# Altium PCB dtdsl.PcbDoc
Units mil, origin at the board's own origin, x right, y up, seen from the top; angles counter-clockwise.
Board outline 6000 x 4000 mil, 2 copper layers (Top Layer, Bottom Layer); 46 components, 29 nets, 140 pads, 0 vias.
Unrouted connection lines stored in the file: 51.
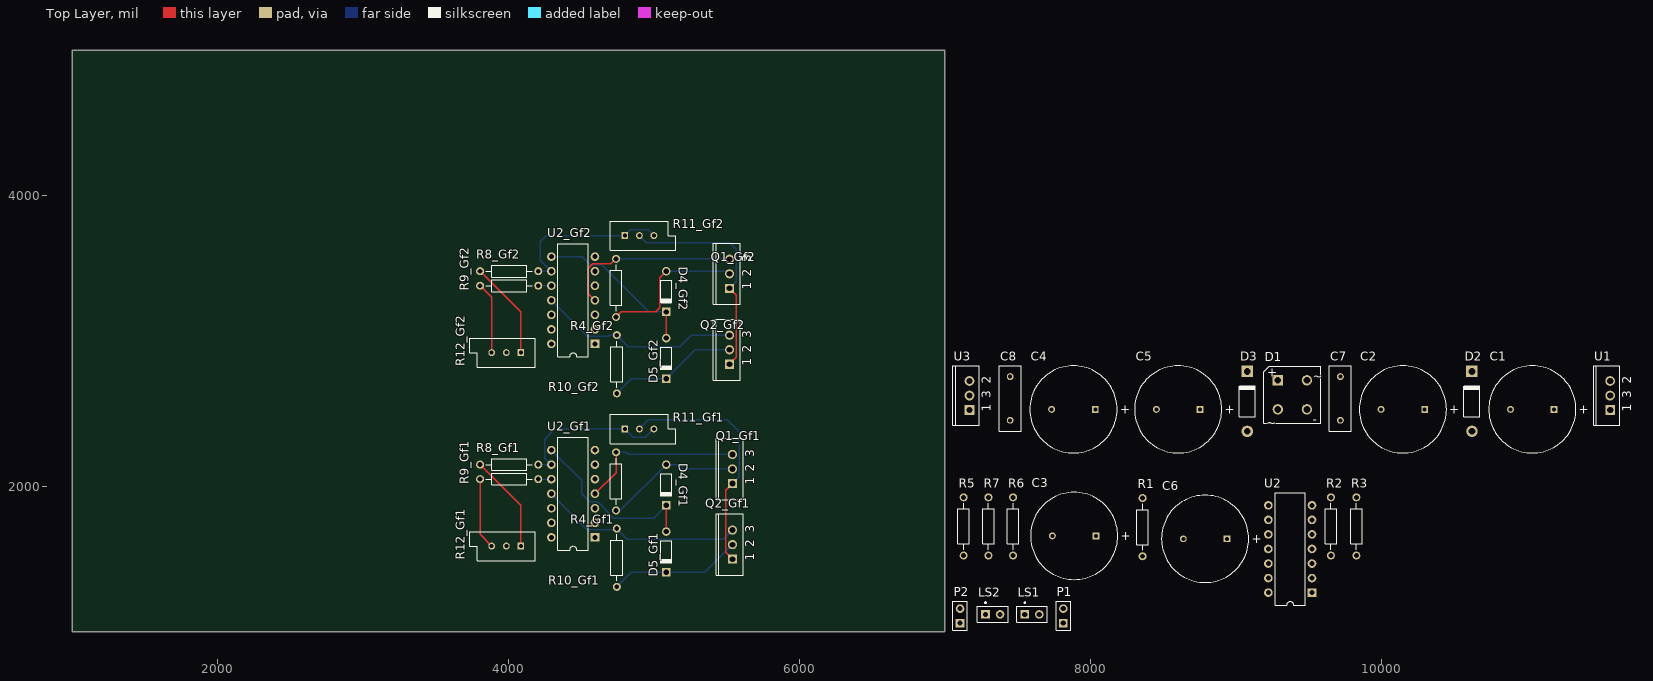
[diagram p0: Top Layer view]
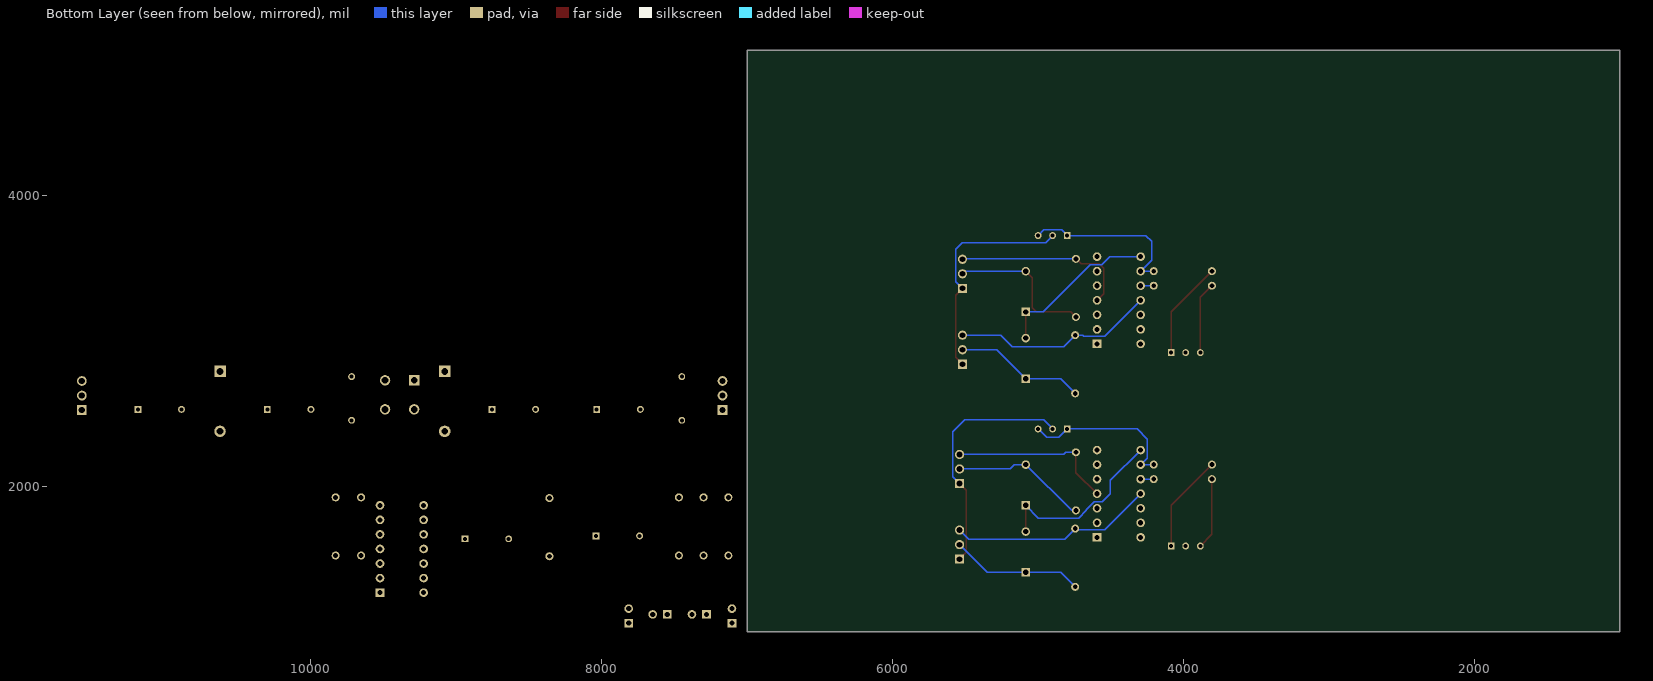
[diagram p1: Bottom Layer view, seen from below]

## Layer stack, top to bottom
Top Solder: solder mask 0.4, Solder Resist, Dk 3.5
Top Layer: signal copper 1.4
Dielectric1: dielectric 12.6, FR-4, Dk 4.8
Bottom Layer: signal copper 1.4
Bottom Solder: solder mask 0.4, Solder Resist, Dk 3.5

## Board outline
1000,1000 7000,1000 7000,5000 1000,5000

## Design rules (kind name [scope] priority, off if disabled: settings)
Clearance [All] p1: gap=10 ignorepadtopadclearanceinfootprint=FALSE except(0: Arc-Hole Track-Hole SMDPad-Hole THPad-Hole Via-Hole Fill-Hole Poly-Hole Region-Hole Text-Hole)
FabricationTestPointUsage TestPointUsage [All] p1: valid=0 allowmultiple=FALSE
FabricationTestpoint Testpoint [All] p1: side=3 testpointundercomponent=TRUE minsize=40 maxsize=100 preferedsize=60 minholesize=0 maxholesize=40 preferedholesize=32 testpointgrid=1 allowsidetop=TRUE allowsidebottom=TRUE usegrid=TRUE gridtolerance=0.01
PolygonConnect [All] p1: connectstyle=Relief reliefconductorwidth=10 reliefentries=4 polygonreliefangle="90 Angle" airgapwidth=10
RoomDefinition Gf1 [InComponentClass('Gf1')] p1: confinementstyle=ConfineIn formatcopy=TRUE lockcomponents=FALSE outline 3665,1250 5740,1250 5740,2525 3665,2525
RoomDefinition Gf2 [InComponentClass('Gf2')] p2: confinementstyle=ConfineIn formatcopy=TRUE lockcomponents=FALSE outline 3665,2580 5740,2580 5740,3855 3665,3855
RoomDefinition U_Sourse [InComponentClass('U_Sourse')] p3: confinementstyle=ConfineIn formatcopy=TRUE lockcomponents=FALSE outline 7045,2220 11735,2220 11735,2940 7045,2940
RoomDefinition dtdsl [InComponentClass('dtdsl')] p4: confinementstyle=ConfineIn formatcopy=TRUE lockcomponents=FALSE outline 7045,1000 7875,1000 7875,1320 7045,1320
RoomDefinition U_Op [InComponentClass('U_Op')] p5: confinementstyle=ConfineIn formatcopy=TRUE lockcomponents=FALSE outline 7080,1170 9915,1170 9915,2070 7080,2070
RoutingVias [All] p1: holewidth=28 width=50 viastyle="Through Hole" minholewidth=28 minwidth=50 maxholewidth=28 maxwidth=50
SolderMaskExpansion [All] p1: expansion=4
Width [All] p1: maxlimit=10 minlimit=10 preferedwidth=10
28 further rules are at their usual default settings.

## Classes and differential pairs
component class dtdsl: LS1 LS2 P1 P2
component class Gf1: D4_Gf1 D5_Gf1 Q1_Gf1 Q2_Gf1 R4_Gf1 R8_Gf1 R9_Gf1 R10_Gf1 R11_Gf1 R12_Gf1 U2_Gf1
component class Gf2: D4_Gf2 D5_Gf2 Q1_Gf2 Q2_Gf2 R4_Gf2 R8_Gf2 R9_Gf2 R10_Gf2 R11_Gf2 R12_Gf2 U2_Gf2
component class U_Op: C3 C6 R1 R2 R3 R5 R6 R7 U2
component class U_Sourse: C1 C2 C4 C5 C7 C8 D1 D2 D3 U1 U3
net class GF[1..2]: GF1 GF2
channel class Gf: Gf1 Gf2

## Components (designator, comment, footprint, x,y, rotation, side; value= is the part's Value field where it differs from the comment)
C1 "Cap Pol1" RB7.6-15 11040,2530 r0 top
C2 "Cap Pol1" RB7.6-15 10150,2530 r0 top
C3 "Cap Pol1" RB7.6-15 7890,1660 r0 top
C4 "Cap Pol1" RB7.6-15 7885,2530 r0 top
C5 "Cap Pol1" RB7.6-15 8605,2530 r0 top
C6 "Cap Pol1" RB7.6-15 8790,1640 r0 top
C7 "Cap" RAD-0.3 9720,2605 r90 top
C8 "Cap" RAD-0.3 7450,2605 r90 top
D1 "18DB05" D-38 9390,2630 r0 top
D2 "Diode 1N4001" DO-41 10625,2585 r90 top
D3 "Diode 1N4001" DO-41 9080,2585 r90 top
D4_Gf1 "Diode 1N4148" DO-35 5085,2010 r270 top (schematic designator D4)
D4_Gf2 "Diode 1N4148" DO-35 5085,3340 r270 top (schematic designator D4)
D5_Gf1 "Diode 1N4148" DO-35 5085,1550 r270 top (schematic designator D5)
D5_Gf2 "Diode 1N4148" DO-35 5085,2880 r270 top (schematic designator D5)
LS1 "Speaker" PIN2 7550,1120 r0 top
LS2 "Speaker" PIN2 7280,1120 r0 top
P1 "Header 2" HDR1X2 7815,1060 r90 top
P2 "Header 2" HDR1X2 7105,1060 r90 top
Q1_Gf1 "2N3904" TO-220AB 5540,2120 r90 top (schematic designator Q1)
Q1_Gf2 "2N3904" TO-220AB 5520,3462.05 r90 top (schematic designator Q1)
Q2_Gf1 "2N3906" TO-220AB 5540,1600 r90 top (schematic designator Q2)
Q2_Gf2 "2N3906" TO-220AB 5520,2940 r90 top (schematic designator Q2)
R1 "Res2" AXIAL-0.4 8360,1720 r90 top
R2 "Res2" AXIAL-0.4 9655,1725 r90 top
R3 "Res2" AXIAL-0.4 9830,1725 r90 top
R4_Gf1 "Res2" AXIAL-0.4 4740,2035 r90 top (schematic designator R4)
R4_Gf2 "Res2" AXIAL-0.4 4740,3365 r90 top (schematic designator R4)
R5 "Res2" AXIAL-0.4 7130,1725 r90 top
R6 "Res2" AXIAL-0.4 7470,1725 r90 top
R7 "Res2" AXIAL-0.4 7300,1725 r90 top
R8_Gf1 "Res2" AXIAL-0.4 4005,2150 r0 top (schematic designator R8)
R8_Gf2 "Res2" AXIAL-0.4 4005,3480 r0 top (schematic designator R8)
R9_Gf1 "Res2" AXIAL-0.4 4005,2050 r0 top (schematic designator R9)
R9_Gf2 "Res2" AXIAL-0.4 4005,3380 r0 top (schematic designator R9)
R10_Gf1 "Res2" AXIAL-0.4 4745,1510 r270 top (schematic designator R10)
R10_Gf2 "Res2" AXIAL-0.4 4745,2840 r270 top (schematic designator R10)
R11_Gf1 "RPot" VR5 4900,2395 r0 top (schematic designator R11)
R11_Gf2 "RPot" VR5 4900,3725 r0 top (schematic designator R11)
R12_Gf1 "RPot" VR5 3985,1590 r180 top (schematic designator R12)
R12_Gf2 "RPot" VR5 3985,2920 r180 top (schematic designator R12)
U1 "L7815CV" TO220ABN 11575,2625 r90 top
U2 "LF347BN" N14A 9375,1570 r90 top
U2_Gf1 "LF347BN" 646-06 4445,1950 r90 top (schematic designator U2)
U2_Gf2 "LF347BN" 646-06 4445,3280 r90 top (schematic designator U2)
U3 "L7915CV" TO220V 7170,2625 r90 top

## Footprints (in the part's own frame and the unit in brackets; to place one, negate y for a bottom-side part, rotate by r counter-clockwise, add the part's x,y. Pads: shape width x height; smd on the part's side, far side on the other; paste and mask are expansions set on the pad)
646-06 [mm] "DIP; 14 Leads; Row Spacing 7.62 mm; Pitch 2.54 mm"
  rect 1.5x1.5 hole 0.9: 1(-7.62,-3.81)
  round 1.5 hole 0.9: 2(-5.08,-3.81) 3(-2.54,-3.81) 4(0,-3.81) 5(2.54,-3.81) 6(5.08,-3.81) 7(7.62,-3.81) 8(7.62,3.81) 9(5.08,3.81) 10(2.54,3.81) 11(0,3.81) 12(-2.54,3.81) 13(-5.08,3.81) 14(-7.62,3.81)
  silkscreen extent -9.85,-2.65 9.85,2.65
AXIAL-0.4 [mm] "Resistor; 2 Leads"
  round 1.4 hole 0.85: 1(-5.08,0) 2(5.08,0)
  silkscreen extent -4.06,-1.02 4.06,1.02
D-38 [mm] "Bridge Rectifier; 4 Terminals; Body 9.4 x 9.4 mm (typ); Pitch 5.08 mm"
  rect 1.8x1.8 hole 1.2: 1(-2.54,2.54)
  round 1.8 hole 1.2: 2(-2.54,-2.54) 3(2.54,-2.54) 4(2.54,2.54)
  silkscreen extent -5,-5 5,5
DO-35 [mm] "Diode, Axial; Body 3.8 x 1.9 mm (LxDia. max), Lead Dia. 0.53 mm (max)"
  round 1.5 hole 0.9: 1(-3.55,0)
  rect 1.5x1.5 hole 0.9: 2(3.55,0)
  silkscreen extent -1.95,-0.95 2.05,0.95
DO-41 [mm] "Diode, Axial; Body 5.2 x 2.7 mm (LxDia. max), Lead Dia. 0.86 mm (max)"
  round 2 hole 1.2: 1(-5.23,0)
  rect 2x2 hole 1.2: 2(5.23,0)
  silkscreen extent -2.65,-1.4 2.75,1.4
HDR1X2 [mm] "Connector; Header; 2 Position"
  rect 1.5x1.5 hole 0.9: 1(0,0)
  round 1.5 hole 0.9: 2(2.54,0)
  silkscreen extent -1.27,-1.27 3.81,1.27
N14A [mm] "DIP; 14 Leads; Row Spacing 7.62 mm; Pitch 2.54 mm"
  rect 1.5x1.5 hole 0.9: 1(-7.62,-3.81)
  round 1.5 hole 0.9: 2(-5.08,-3.81) 3(-2.54,-3.81) 4(0,-3.81) 5(2.54,-3.81) 6(5.08,-3.81) 7(7.62,-3.81) 8(7.62,3.81) 9(5.08,3.81) 10(2.54,3.81) 11(0,3.81) 12(-2.54,3.81) 13(-5.08,3.81) 14(-7.62,3.81)
  silkscreen extent -9.85,-2.65 9.85,2.65
PIN2 [mm] "Photosensitive Diode; 2 Leads"
  rect 1.5x1.5 hole 0.9: 1(0,0)
  round 1.5 hole 0.9: 2(2.54,0)
  silkscreen extent -1.4,-1.4 3.94,2.17
RAD-0.3 [mm] "Capacitor; 2 Leads"
  round 1.2 hole 0.7: 1(-3.81,0) 2(3.81,0)
  silkscreen extent -5.71,-1.91 5.71,1.91
RB7.6-15 [mm] "Polarized Capacitor (Radial); 2 Leads"
  rect 1.2x1.2 hole 0.7: 1(3.81,0)
  round 1.2 hole 0.7: 2(-3.81,0)
  silkscreen extent -7.62,-7.62 7.62,7.62
TO220ABN [mm] "TO, Thru-Hole, Vertical, Heatsink Mounted; 3 In-Line Leads; Pitch 2.54 mm; Pin sequence 1, 3, 2"
  rect 1.7x1.7 hole 1.1: 1(-2.54,0)
  round 1.7 hole 1.1: 2(2.54,0) 3(0,0)
  silkscreen extent -5.2,-1.7 5.2,2.9
TO220V [mm] "TO, Thru-Hole, Vertical, Heatsink Mounted; 3 In-Line Leads; Pitch 2.54 mm; Pin sequence 1, 3, 2"
  rect 1.7x1.7 hole 1.1: 1(-2.54,0)
  round 1.7 hole 1.1: 2(2.54,0) 3(0,0)
  silkscreen extent -5.2,-1.7 5.2,2.9
TO-220AB [mm] "TO, Thru-Hole, Vertical, Heatsink Mounted; 3 In-Line Leads; Pitch 2.54 mm"
  rect 1.6x1.6 hole 1: 1(-2.54,0)
  round 1.6 hole 1: 2(0,0) 3(2.54,0)
  silkscreen extent -5.35,-1.85 5.35,2.85
VR5 [mm] "Potentiometer; 3 Leads"
  rect 1.2x1.2 hole 0.7: 1(-2.54,0)
  round 1.2 hole 0.7: 2(0,0) 3(2.54,0)
  silkscreen extent -5.08,-2.54 6.35,2.54

## Part data
C1 C2 C3 C4 C5 C6: "Polarized Capacitor (Radial)"
C7 C8: "Capacitor"
D1: library part Bridge1, "Full Wave Diode Bridge"
D2 D3: "1 Amp General Purpose Rectifier"
D4_Gf1 D4_Gf2 D5_Gf1 D5_Gf2: "High Conductance Fast Diode"
LS1 LS2: "Loudspeaker"
P1 P2: "Header, 2-Pin"
Q1_Gf1 Q1_Gf2: "NPN General Purpose Amplifier"
Q2_Gf1 Q2_Gf2: "PNP General Purpose Amplifier"
R1 R2 R3 R4_Gf1 R4_Gf2 R5 R6 R7 R8_Gf1 R8_Gf2 R9_Gf1 R9_Gf2 R10_Gf1 R10_Gf2: "Resistor"
R11_Gf1 R11_Gf2 R12_Gf1 R12_Gf2: "Potentiometer"
U1: "Positive Voltage Regulator"
U2: "Wide-Bandwidth Quad JFET Input Operational Amplifier"
U2_Gf1 U2_Gf2: "Quad JFET Input Operational Amplifier, Internally Compensated"
U3: "Negative Voltage Regulator"

## Nets (pads, with @x,y where several pads share a name; then routed paths per layer and width w, separated by ;. In a path a pad name is that pad's centre, name@x,y a point inside that pad or via, vN(x,y) a via of type N, cw(c..) or ccw(c..) an arc to the next point about the centre after c; other vN are vias at no path point)
+15V: C2.1 C7.1 D2.2 Q1_Gf1.3 Q1_Gf2.3 R4_Gf1.2 R4_Gf2.2 U1.2 U2.4 U2_Gf1.4 U2_Gf2.4 | length 2389.8
  Top Layer w10: U2_Gf1.4 4740,2095 R4_Gf1.2 ; U2_Gf2.4 4550,3325 4550,3500 4580,3530 4705,3530 R4_Gf2.2
  Bottom Layer w10: R4_Gf1.2 4810,2235 4825,2220 Q1_Gf1.3 ; R4_Gf2.2 5520,3565 Q1_Gf2.3
-15V: C5.2 C8.2 D3.1 Q2_Gf1.3 Q2_Gf2.3 R10_Gf1.1 R10_Gf2.1 U2.11 U2_Gf1.11 U2_Gf2.11 U3.2 | length 2808.5
  Bottom Layer w10: U2_Gf1.11 4543,1702 4745,1702 R10_Gf1.1 4817,1638 5478,1638 Q2_Gf1.3 ; U2_Gf2.11 4543,3032 4686,3032 4694,3040 R10_Gf2.1 4825,2960 5178,2960 5258,3040 Q2_Gf2.3
GF1: LS1.1 Q1_Gf1.1 Q2_Gf1.1 R11_Gf1.2 | length 1680.1
  Top Layer w10: Q2_Gf1.1 5493,1547 5493,1973 Q1_Gf1.1
  Bottom Layer w10: R11_Gf1.2 4962,2457 5505,2457 5587,2375 5587,2067 Q1_Gf1.1
GF2: LS2.1 Q1_Gf2.1 Q2_Gf2.1 R11_Gf2.2 | length 1554.8
  Top Layer w10: Q2_Gf2.1 5567,2887 5567,3315.05 Q1_Gf2.1
  Bottom Layer w10: R11_Gf2.2 4948,3677 5520,3677 5567,3630 5567,3409.05 Q1_Gf2.1
GND: C1.2 C2.2 C4.1 C5.1 C7.2 C8.1 D2.1 D3.2 LS1.2 LS2.2 P2.2 R5.1 R7.2 R8_Gf1.1 R8_Gf2.1 R12_Gf1.1 R12_Gf2.1 U1.3 U2.5 U3.1 | length 1352
  Top Layer w10: R8_Gf1.1 4085,1870 R12_Gf1.1 ; R8_Gf2.1 4085,3200 R12_Gf2.1
IN2: R3.2 R12_Gf1.2 R12_Gf2.2 U2.7
NetC1_1: C1.1 D1.2 U1.1
NetC3_1: C3.1 P2.1
NetC3_2: C3.2 R1.2
NetC4_2: C4.2 D1.4 U3.3
NetC6_1: C6.1 R2.2 U2.1
NetC6_2: C6.2 R6.1 R7.1
NetD1_1: D1.1 P1.1
NetD1_3: D1.3 P1.2
NetD4_Gf1_1: D4_Gf1.1 Q1_Gf1.2 R4_Gf1.1 | length 942.7
  Bottom Layer w10: R4_Gf1.1 4770.24,1835 D4_Gf1.1 5163.24,2149.76 5193,2120 Q1_Gf1.2
NetD4_Gf1_2: D4_Gf1.2 D5_Gf1.1 U2_Gf1.8 | length 1255.7
  Top Layer w10: D5_Gf1.1 D4_Gf1.2
  Bottom Layer w10: U2_Gf1.8 4504,2041 4504,1951 4560,1895 4613,1895 4668,1840 4668,1835 4720,1783 4997.76,1783 D4_Gf1.2
NetD4_Gf2_1: D4_Gf2.1 Q1_Gf2.2 R4_Gf2.1 | length 1037.7
  Top Layer w10: R4_Gf2.1 4777,3202 5012,3202 5040,3230 5040,3434.76 D4_Gf2.1
  Bottom Layer w10: D4_Gf2.1 5502.28,3479.76 Q1_Gf2.2
NetD4_Gf2_2: D4_Gf2.2 D5_Gf2.1 U2_Gf2.8 | length 1127.8
  Top Layer w10: D5_Gf2.1 D4_Gf2.2
  Bottom Layer w10: U2_Gf2.8 4508,3580 4563,3525 4641,3525 4965.76,3200.24 D4_Gf2.2
NetD5_Gf1_2: D5_Gf1.2 Q2_Gf1.2 R10_Gf1.2 | length 915.1
  Bottom Layer w10: R10_Gf1.2 4845.24,1410.24 D5_Gf1.2 5350.24,1410.24 Q2_Gf1.2
NetD5_Gf2_2: D5_Gf2.2 Q2_Gf2.2 R10_Gf2.2 | length 899.3
  Bottom Layer w10: R10_Gf2.2 4845.24,2740.24 D5_Gf2.2 5284.76,2940 Q2_Gf2.2
NetR1_1: R1.1 R2.1 U2.2
NetR3_1: R3.1 R6.2 U2.6
NetR5_2: R5.2 U2.3
NetR8_Gf1_2: R8_Gf1.2 R11_Gf1.1 R11_Gf1.3 U2_Gf1.9 | length 1110.7
  Bottom Layer w10: R8_Gf1.2 U2_Gf1.9 4250,2195 4250,2325 4320,2395 R11_Gf1.1 4858,2337 4942,2337 R11_Gf1.3
NetR8_Gf2_2: R8_Gf2.2 R11_Gf2.1 R11_Gf2.3 U2_Gf2.9 | length 1154.9
  Bottom Layer w10: R8_Gf2.2 U2_Gf2.9 4220,3555 4220,3685 4260,3725 R11_Gf2.1 4839,3764 4961,3764 R11_Gf2.3
NetR9_Gf1_1: R9_Gf1.1 R12_Gf1.3 | length 493.1
  Top Layer w10: R9_Gf1.1 3805,1670 R12_Gf1.3
NetR9_Gf1_2: R9_Gf1.2 U2_Gf1.10 | length 90
  Bottom Layer w10: R9_Gf1.2 U2_Gf1.10
NetR9_Gf2_1: R9_Gf2.1 R12_Gf2.3 | length 493.1
  Top Layer w10: R9_Gf2.1 3885,3300 R12_Gf2.3
NetR9_Gf2_2: R9_Gf2.2 U2_Gf2.10 | length 90
  Bottom Layer w10: R9_Gf2.2 U2_Gf2.10
pads on no net: U2.8 U2.9 U2.10 U2.12 U2.13 U2.14 U2_Gf1.1 U2_Gf1.2 U2_Gf1.3 U2_Gf1.5 U2_Gf1.6 U2_Gf1.7 U2_Gf1.12 U2_Gf1.13 U2_Gf1.14 U2_Gf2.1 U2_Gf2.2 U2_Gf2.3 U2_Gf2.5 U2_Gf2.6 U2_Gf2.7 U2_Gf2.12 U2_Gf2.13 U2_Gf2.14

## Text inside footprints (layer, text, board x,y; h text height)
C1: Top Overlay "+" at 11360.15,2500.99 h59.06
C2: Top Overlay "+" at 10470.15,2500.99 h59.06
C3: Top Overlay "+" at 8210.15,1630.99 h59.06
C4: Top Overlay "+" at 8205.15,2500.99 h59.06
C5: Top Overlay "+" at 8925.15,2500.99 h59.06
C6: Top Overlay "+" at 9110.15,1610.99 h59.06
D1: Top Overlay "+" at 9216.38,2754.57 h59.06; Top Overlay "-" at 9530,2430 h59.05; Top Overlay "~" at 9210,2410 h59.05; Top Overlay "~" at 9530,2730 h59.05
Q1_Gf1: Top Overlay "2" at 5690.59,2100.32 h59.06 r90; Top Overlay "1" at 5690.59,2010.16 h59.06 r90; Top Overlay "3" at 5690.59,2200.32 h59.06 r90
Q1_Gf2: Top Overlay "2" at 5670.59,3442.36 h59.06 r90; Top Overlay "1" at 5670.59,3352.2 h59.06 r90; Top Overlay "3" at 5670.59,3542.36 h59.06 r90
Q2_Gf1: Top Overlay "2" at 5690.59,1580.32 h59.06 r90; Top Overlay "1" at 5690.59,1490.16 h59.06 r90; Top Overlay "3" at 5690.59,1680.32 h59.06 r90
Q2_Gf2: Top Overlay "2" at 5670.59,2920.32 h59.06 r90; Top Overlay "1" at 5670.59,2830.16 h59.06 r90; Top Overlay "3" at 5670.59,3020.32 h59.06 r90
U1: Top Overlay "3" at 11719.68,2605.32 h59.06 r90; Top Overlay "2" at 11719.68,2705.32 h59.06 r90; Top Overlay "1" at 11719.69,2515.16 h59.06 r90
U3: Top Overlay "3" at 7314.69,2605.32 h59.06 r90; Top Overlay "2" at 7314.69,2705.32 h59.06 r90; Top Overlay "1" at 7314.69,2515.16 h59.06 r90